# EAGLE board Procesor-Attiny85 (EAGLE 9.4.0)
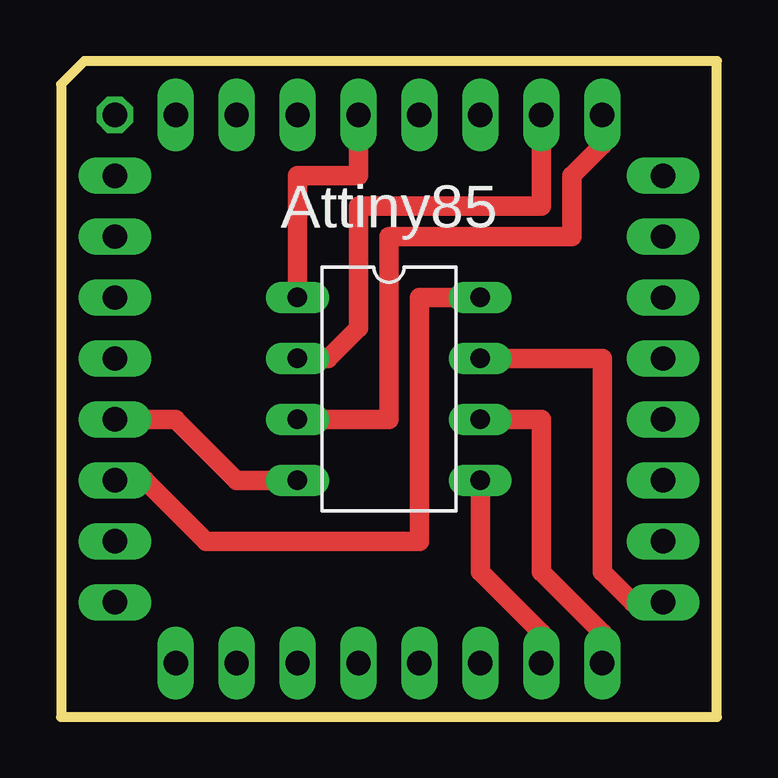
[diagram p0: board, top side]
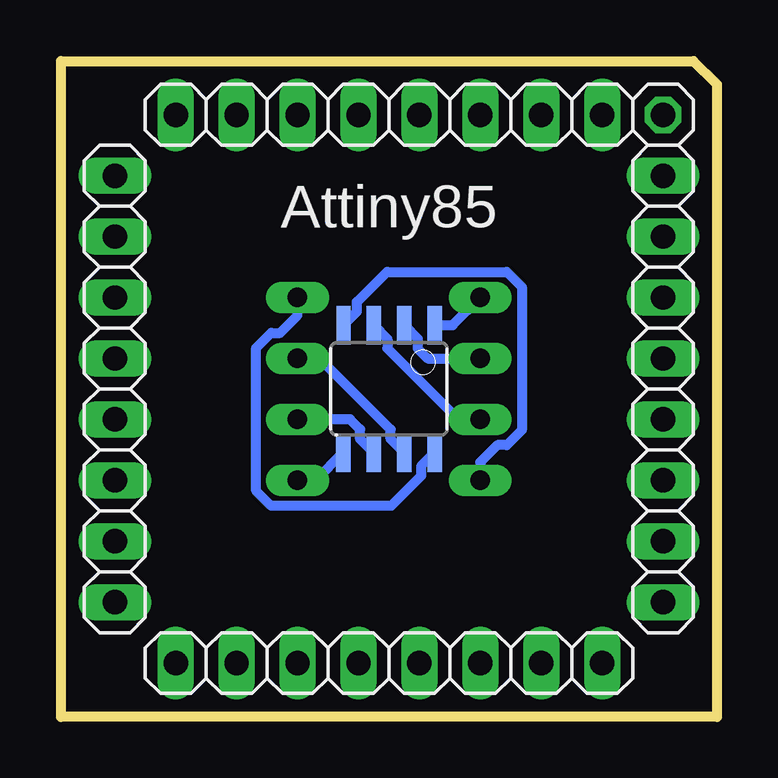
[diagram p1: board, bottom side, seen from below]

Size 27.34 x 27.34 mm. Coordinates in mm from the lower left corner, seen from the top.
Outline: 0,26.37 0,0 27.34,0 27.34,27.34 0.97,27.34 0,26.37
Copper layers (1*16): Top 0.035mm / dielectric 1.5mm / Bottom 0.035mm
Design rules "default *": minimum track width 10mil, minimum drill 24mil, track to track 8mil, track to pad 8mil, pad to pad 8mil, via to via 8mil, smd to smd 8mil, copper to edge 10mil, drill to drill 8mil, minimum pad ring 10mil, minimum via ring 8mil, stop-mask expansion 4mil, vias tented up to drill 0mil, thermal gap 10mil

## Footprints (pad centres in the part's own frame; a part is rotated, then mirrored left to right if it is on the bottom)
DIL08 = drill 0.813 long: 1 -3.81,-3.81; 2 -1.27,-3.81; 3 1.27,-3.81; 4 3.81,-3.81; 5 3.81,3.81; 6 1.27,3.81; 7 -1.27,3.81; 8 -3.81,3.81
1X01 = drill 1.016 octagon: 1 0,0
8S1 = smd 0.6 x 1.6: 1 -1.905,-2.654; 2 -0.645,-2.654; 3 0.625,-2.654; 4 1.895,-2.654; 5 1.905,2.654; 6 0.635,2.654; 7 -0.635,2.654; 8 -1.905,2.654
1X08 = drill 1.016 long: 1 -8.89,0; 2 -6.35,0; 3 -3.81,0; 4 -1.27,0; 5 1.27,0; 6 3.81,0; 7 6.35,0; 8 8.89,0

## Placement (x,y rotation side)
ATTINY85  [DIL08]  13.67,13.67 270 top
E$1  [1X01]  2.24,25.1 0 bottom
E$2  [8S1]  13.67,13.67 180 bottom
E$9  [1X08]  2.24,13.67 90 bottom
E$10  [1X08]  13.67,25.1 0 bottom
E$11  [1X08]  25.1,13.67 270 bottom
E$12  [1X08]  13.67,2.24 180 bottom

## Library data of the parts
ATTINY85 E$2 = atmel
E$1 E$9-E$12 = pinhead

## Nets
S$2: ATTINY85.1 E$2.1 E$10.5
S$3: ATTINY85.4 E$2.4 E$9.4
S$4: ATTINY85.8 E$2.8 E$9.3
S$5: ATTINY85.7 E$2.7 E$11.8
S$6: ATTINY85.3 E$2.3 E$10.1
S$7: ATTINY85.2 E$2.2 E$10.2
S$8: ATTINY85.5 E$2.5 E$12.7
S$10: ATTINY85.6 E$2.6 E$12.8

## Tracks (layer width: path | path; a pad name or v marks a point on that pad's centre or on a via)
S$2
  Top 0.813: ATTINY85.1 9.86,22.56 12.4,22.56 E$10.5
  Bottom 0.406: E$2.1 11.02,16.32 ATTINY85.1
S$3
  Top 0.813: ATTINY85.4 7.32,9.86 4.78,12.4 E$9.4
  Bottom 0.406: ATTINY85.4 9.86,10.62 9.15,11.33 8.76,11.33 8.13,11.96 8.13,17.92 8.76,18.55 13.75,18.55 15,17.29 15,16.89 E$2.4
S$4
  Top 0.813: ATTINY85.8 14.94,17.48 14.94,7.32 6.05,7.32 3.51,9.86 E$9.3
  Bottom 0.406: ATTINY85.8 17.48,16.73 18.2,16.01 18.58,16.01 19.21,15.38 19.21,9.42 18.58,8.79 13.58,8.79 12.33,10.05 12.33,10.45 E$2.8
S$5
  Top 0.813: ATTINY85.7 22.56,14.94 22.56,6.05 23.83,4.78 E$11.8
  Bottom 0.406: E$2.7 13.6,11.58 13.6,11.98 16.55,14.94 ATTINY85.7
S$6
  Top 0.813: ATTINY85.3 13.67,12.4 13.67,20.02 21.29,20.02 21.29,22.56 22.56,23.83 E$10.1
  Bottom 0.406: E$2.3 13.73,15.76 13.73,15.36 10.78,12.4 ATTINY85.3
S$7
  Top 0.813: ATTINY85.2 11.13,14.94 12.4,16.21 12.4,21.29 20.02,21.29 E$10.2
  Bottom 0.406: E$2.2 12.47,15.77 12.47,15.36 12.06,14.94 ATTINY85.2
S$8
  Top 0.813: ATTINY85.5 17.48,6.05 20.02,3.51 E$12.7
  Bottom 0.406: E$2.5 16.73,9.86 ATTINY85.5
S$10
  Top 0.813: ATTINY85.6 20.02,12.4 20.02,6.05 22.56,3.51 E$12.8
  Bottom 0.406: E$2.6 14.87,11.58 14.87,11.98 15.28,12.4 ATTINY85.6

## Text on the board
tPlace: Attiny85
bPlace: Attiny85